# EAGLE board PCBdone_ (EAGLE 9.7.0)
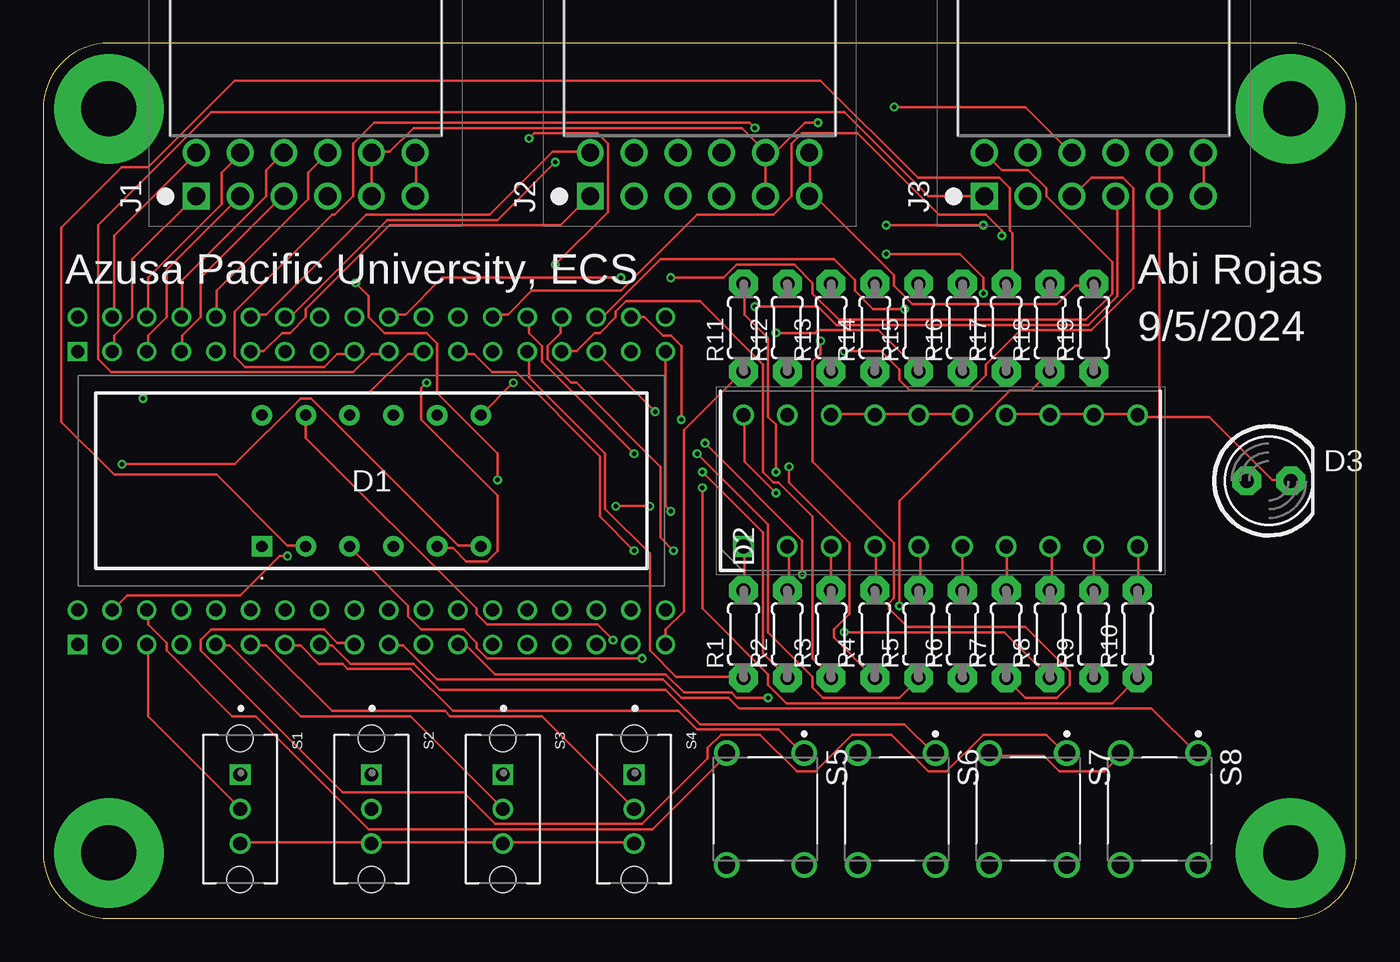
[diagram p0: board, top side]
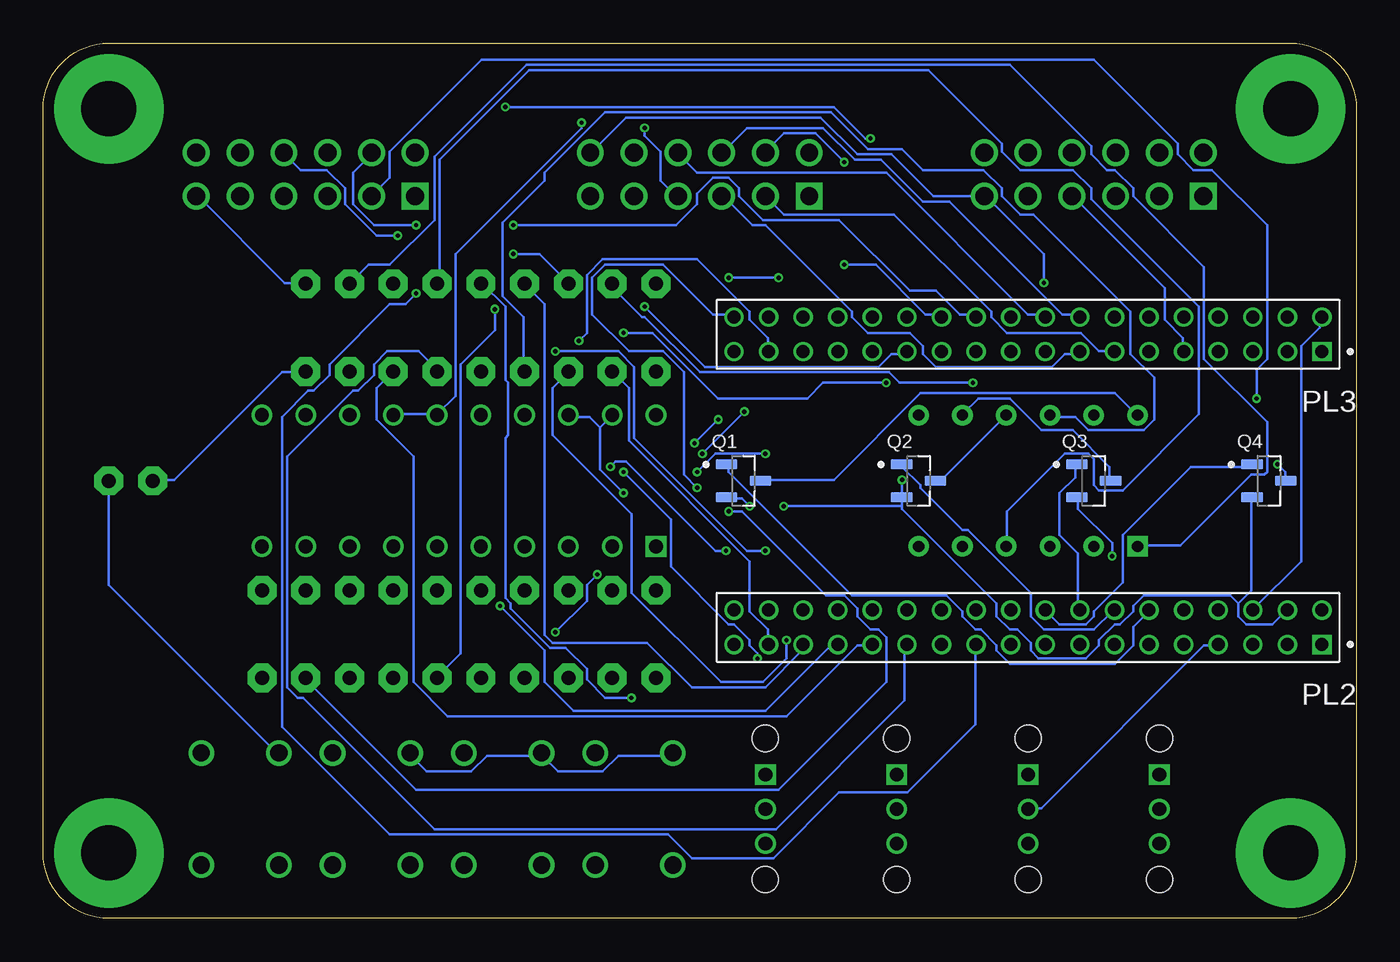
[diagram p1: board, bottom side, seen from below]

Size 76.2 x 50.8 mm. Coordinates in mm from the lower left corner, seen from the top.
Outline: 3.81,0 72.39,0 arc90 76.2,3.81 76.2,46.99 arc90 72.39,50.8 3.81,50.8 arc90 0,46.99 0,3.81 arc90 3.81,0
Copper layers (1*16): Top / Bottom
Stack-up Default Layer Stack: Top User Defined 0.035559375mm / Dielectric-1 User Defined 1.6mm / Bottom User Defined 0.035559375mm
Design rules: minimum copper width 6mil, minimum drill size 10mil, copper clearance wire_polygon to wire_polygon 6mil, copper clearance wire_polygon to pad_smd 6mil, copper clearance wire_polygon to via 6mil, copper clearance pad_smd to pad_smd 6mil, copper clearance pad_smd to via 6mil, copper clearance via to via 6mil, copper clearance smd to pad (same net) 6mil, copper clearance smd to via (same net) 6mil, copper clearance smd to smd (same net) 6mil, dimension clearance 15mil, via restrict clearance 0mil, restrict clearance 0mil, drill distance 6mil, keepout clearance 0mil

## Footprints (pad centres in the part's own frame; a part is rotated, then mirrored left to right if it is on the bottom)
LDQM282RI = drill 0.65 pad 1.192 square: 1 0,0 | drill 0.65 pad 1.192: 2 2.54,0; 3 5.08,0; 4 7.62,0; 5 10.16,0; 6 12.7,0; 7 12.7,7.62; 8 10.16,7.62; 9 7.62,7.62; 10 5.08,7.62; 11 2.54,7.62; 12 0,7.62
DIPS762W50P254L2527H825Q20N = drill 0.8 pad 1.2 square: 1 0,0 | drill 0.8 pad 1.2: 2 0,-2.54; 3 0,-5.08; 4 0,-7.62; 5 0,-10.16; 6 0,-12.7; 7 0,-15.24; 8 0,-17.78; 9 0,-20.32; 10 0,-22.86; 11 7.62,-22.86; 12 7.62,-20.32; 13 7.62,-17.78; 14 7.62,-15.24; 15 7.62,-12.7; 16 7.62,-10.16; 17 7.62,-7.62; 18 7.62,-5.08; 19 7.62,-2.54; 20 7.62,0
LED5MM = drill 0.813 pad 1.676 octagon: A -1.27,0; K 1.27,0
PMOD-SOCKET-FOR-HOST-BOARD = drill 1.04 pad 1.55 square: 1 0,0 | drill 1.04 pad 1.55: 2 2.54,0; 3 5.08,0; 4 7.62,0; 5 10.16,0; 6 12.7,0; 7 0,2.54; 8 2.54,2.54; 9 5.08,2.54; 10 7.62,2.54; 11 10.16,2.54; 12 12.7,2.54
MT_125_250 = drill 3.175 pad 6.35: 1 0,0
TE_4-1734506-1 = drill 0.75 pad 1.1 square: 1 0,0 | drill 0.75 pad 1.1: 2 0,-2; 3 2.007,0; 4 2.007,-2; 5 4.013,0; 6 4.013,-2; 7 6.02,0; 8 6.02,-2; 9 8.026,0; 10 8.026,-2; 11 10.033,0; 12 10.033,-2; 13 12.04,0; 14 12.04,-2; 15 14.046,0; 16 14.046,-2; 17 16.053,0; 18 16.053,-2; 19 18.059,0; 20 18.059,-2; 21 20.066,0; 22 20.066,-2; 23 22.073,0; 24 22.073,-2; 25 24.079,0; 26 24.079,-2; 27 26.086,0; 28 26.086,-2; 29 28.092,0; 30 28.092,-2; 31 30.099,0; 32 30.099,-2; 33 32.106,0; 34 32.106,-2; 35 34.112,0; 36 34.112,-2
SOT95P230X110-3N = smd 1.26 x 0.59: 1 -0.98,0.95; 2 -0.98,-0.95; 3 0.98,0
0204/5 = drill 0.813 pad 1.676 octagon: 1 -2.54,0; 2 2.54,0
SW_OS102011MS2QN1 = drill 0.8 square: 1 -2,0 | drill 0.8: 2 0,0; 3 2,0 | hole 1.5: -4.1,0; 4.1,0
SW_1825910-7 = drill 0.99: 1 -3.25,2.25; 2 3.25,2.25; 3 -3.25,-2.25; 4 3.25,-2.25

## Placement (x,y rotation side)
D1  [LDQM282RI]  12.7,21.59 0 top
D2  [DIPS762W50P254L2527H825Q20N]  40.64,21.59 90 top
D3  [LED5MM]  71.12,25.4 0 top
J1  [PMOD-SOCKET-FOR-HOST-BOARD]  8.89,41.91 0 top
J2  [PMOD-SOCKET-FOR-HOST-BOARD]  31.75,41.91 0 top
J3  [PMOD-SOCKET-FOR-HOST-BOARD]  54.61,41.91 0 top
MT1  [MT_125_250]  72.39,3.81 0 top
MT2  [MT_125_250]  72.39,46.99 0 top
MT3  [MT_125_250]  3.81,46.99 0 top
MT4  [MT_125_250]  3.81,3.81 0 top
PL2  [TE_4-1734506-1]  2,15.9 180 bottom
PL3  [TE_4-1734506-1]  2,32.9 180 bottom
Q1  [SOT95P230X110-3N]  35.56,25.4 0 bottom
Q2  [SOT95P230X110-3N]  25.4,25.4 0 bottom
Q3  [SOT95P230X110-3N]  15.24,25.4 0 bottom
Q4  [SOT95P230X110-3N]  5.08,25.4 0 bottom
R1  [0204/5]  40.64,16.51 90 top
R2  [0204/5]  43.18,16.51 90 top
R3  [0204/5]  45.72,16.51 90 top
R4  [0204/5]  48.26,16.51 90 top
R5  [0204/5]  50.8,16.51 90 top
R6  [0204/5]  53.34,16.51 90 top
R7  [0204/5]  55.88,16.51 90 top
R8  [0204/5]  58.42,16.51 90 top
R9  [0204/5]  60.96,16.51 90 top
R10  [0204/5]  63.5,16.51 90 top
R11  [0204/5]  40.64,34.29 90 top
R12  [0204/5]  43.18,34.29 90 top
R13  [0204/5]  45.72,34.29 90 top
R14  [0204/5]  48.26,34.29 90 top
R15  [0204/5]  50.8,34.29 90 top
R16  [0204/5]  53.34,34.29 90 top
R17  [0204/5]  55.88,34.29 90 top
R18  [0204/5]  58.42,34.29 90 top
R19  [0204/5]  60.96,34.29 90 top
S1  [SW_OS102011MS2QN1]  11.43,6.35 270 top
S2  [SW_OS102011MS2QN1]  19.05,6.35 270 top
S3  [SW_OS102011MS2QN1]  26.67,6.35 270 top
S4  [SW_OS102011MS2QN1]  34.29,6.35 270 top
S5  [SW_1825910-7]  41.91,6.35 270 top
S6  [SW_1825910-7]  49.53,6.35 270 top
S7  [SW_1825910-7]  57.15,6.35 270 top
S8  [SW_1825910-7]  64.77,6.35 270 top

## Library data of the parts
D1 = eagle-library-engr-240-f24; DESCRIPTION: LED Displays & Accessories LED Display; HEIGHT: 6.05mm; MANUFACTURER_NAME: Lumex; MANUFACTURER_PART_NUMBER: LDQ-M282RI; MOUSER_PART_NUMBER: 696-LDQ-M282RI; MOUSER_PRICE-STOCK: https://www.mouser.com/Search/Refine.aspx?Keyword=696-LDQ-M282RI
D2 = eagle-library-engr-240-f24; DESCRIPTION: LED Uni-Color Green 565nm 20-Pin PDIP; HEIGHT: 8.25mm; MANUFACTURER_NAME: Lite-On; MANUFACTURER_PART_NUMBER: LTA-1000G; MOUSER_PART_NUMBER: 859-LTA-1000G; MOUSER_PRICE-STOCK: https://www.mouser.co.uk/ProductDetail/Lite-On/LTA-1000G?qs=%2FTKcI5XXRKq0QINzVmwJHg%3D%3D
D3 J1-J3 MT1-MT4 PL2 PL3 R1-R19 = eagle-library-engr-240-f24
Q1-Q4 = eagle-library-engr-240-f24; MANUFACTURER: Nexperia; MAXIMUM_PACKAGE_HEIGHT: 1.10 mm; PARTREV: 1; SNAPEDA_PN: NX2301P; STANDARD: IPC 7351B
S1-S4 = eagle-library-engr-240-f24; MANUFACTURER: C&K; STANDARD: MANUFACTURER RECOMMENDATIONS
S5-S8 = eagle-library-engr-240-f24; MANUFACTURER: TE Connectivity; PARTREV: C10; STANDARD: Manufacturer Recommendation

## Nets
3.3V: J1.6 J1.12 J2.6 J2.12 J3.6 J3.12 PL2.4 Q1.2 Q2.2 Q3.2 Q4.2 R19.2
BAR_1: PL3.27 R1.1
BAR_2: PL3.28 R2.1
BAR_3: PL3.29 R3.1
BAR_4: PL3.30 R4.1
BAR_5: PL3.31 R5.1
BAR_6: PL3.32 R6.1
BAR_7: PL3.33 R7.1
BAR_8: PL3.34 R8.1
BAR_9: PL3.35 R9.1
BAR_10: PL3.36 R10.1
BUTTON_1: PL2.13 S5.1
BUTTON_2: PL2.15 S6.1
BUTTON_3: PL2.17 S7.1
BUTTON_4: PL2.19 S8.1
DIGIT_1: PL2.12 Q1.1
DIGIT_1_A: D1.12 Q1.3
DIGIT_2: PL2.14 Q2.1
DIGIT_2_A: D1.9 Q2.3
DIGIT_3: PL2.16 Q3.1
DIGIT_3_A: D1.8 Q3.3
DIGIT_4: PL2.18 Q4.1
DIGIT_4_A: D1.6 Q4.3
GND: D2.11 D2.12 D2.13 D2.14 D2.15 D2.16 D2.17 D2.18 D2.19 D2.20 D3.K J1.5 J1.11 J2.5 J2.11 J3.5 J3.11 PL2.6 PL3.2 S5.3 S6.3 S7.3 S8.3
N$2: D3.A R19.1
N$3: S1.3 S2.3 S3.3 S4.3
N$4: D1.1 R18.2
N$6: D1.2 R17.2
N$7: D2.1 R1.2
N$8: D1.3 R11.2
N$9: D2.2 R2.2
N$10: D1.4 R16.2
N$12: D1.5 R12.2
N$13: D2.3 R3.2
N$15: D2.4 R4.2
N$16: D1.11 R13.1
N$18: D1.10 R14.1
N$19: D2.5 R5.2
N$21: D2.6 R6.2
N$22: D1.7 R15.1
N$24: D2.7 R7.2
N$26: D2.8 R8.2
N$28: D2.9 R9.2
N$30: D2.10 R10.2
PMOD_1_1: J1.1 PL3.3
PMOD_1_2: J1.2 PL3.5
PMOD_1_3: J1.3 PL3.7
PMOD_1_4: J1.4 PL3.9
PMOD_1_5: J1.7 PL3.4
PMOD_1_6: J1.8 PL3.6
PMOD_1_7: J1.9 PL3.8
PMOD_1_8: J1.10 PL3.10
PMOD_2_1: J2.1 PL3.11
PMOD_2_2: J2.2 PL3.13
PMOD_2_3: J2.3 PL3.15
PMOD_2_4: J2.4 PL3.17
PMOD_2_5: J2.7 PL3.12
PMOD_2_6: J2.8 PL3.14
PMOD_2_7: J2.9 PL3.16
PMOD_2_8: J2.10 PL3.18
PMOD_3_1: J3.1 PL3.19
PMOD_3_2: J3.2 PL3.21
PMOD_3_3: J3.3 PL3.23
PMOD_3_4: J3.4 PL3.25
PMOD_3_5: J3.7 PL3.20
PMOD_3_6: J3.8 PL3.22
PMOD_3_7: J3.9 PL3.24
PMOD_3_8: J3.10 PL3.26
SEGMENT_A: PL2.21 R13.2
SEGMENT_B: PL2.23 R15.2
SEGMENT_C: PL2.25 R16.1
SEGMENT_D: PL2.27 R17.1
SEGMENT_DP: PL2.35 R11.1
SEGMENT_E: PL2.29 R18.1
SEGMENT_F: PL2.31 R14.2
SEGMENT_G: PL2.33 R12.1
SWITCH_1: PL2.5 S1.2
SWITCH_2: PL2.7 S2.2
SWITCH_3: PL2.9 S3.2
SWITCH_4: PL2.11 S4.2

## Tracks (layer width: path | path; a pad name or v marks a point on that pad's centre or on a via)
3.3V  (via drill 0.25)
  Top 0.152: v14.17,21.03 13.72,21.03 11.43,18.75 4.88,18.75 4.12,17.98 PL2.4 | v33.22,23.93 v35.2,23.93 | J3.6 67.36,41.91 67.36,44.35 J3.12 | J1.6 21.64,41.91 21.64,44.35 J1.12 | 44.5,42.22 44.5,44.35 J2.12 | 44.5,42.22 44.5,41.91 J2.6 44.5,42.22 | 44.5,42.22 49.38,37.34 49.38,36.73 50.44,35.66 58.83,35.66 59.89,36.73 60.96,36.73 R19.2 | v26.36,25.45 26.36,26.98 22.86,30.48 22.86,33.38 22.25,33.98 19.81,33.98 18.9,34.9 18.9,36.12 v18.14,36.88
  Bottom 0.152: 6.86,18.29 6.1,19.05 6.1,24.38 Q4.2 | 6.86,18.29 6.86,17.53 6.4,17.07 4.88,17.07 4.12,17.83 PL2.4 | v14.17,21.03 14.17,21.79 16.15,23.77 16.15,24.38 Q3.2 | 26.36,23.93 26.36,23.77 20.88,18.29 20.88,17.53 20.12,16.76 19.66,16.76 18.9,16 18.9,15.54 18.44,15.09 15.7,15.09 14.94,15.85 14.94,16.15 14.02,17.07 13.72,17.07 12.95,17.83 12.95,18.14 12.34,18.75 7.32,18.75 6.86,18.29 | 26.36,23.93 26.36,24.38 Q2.2 26.36,24.54 v26.36,25.45 | v35.2,23.93 35.66,24.38 36.42,24.38 Q1.2 | 26.36,23.93 v33.22,23.93 | R19.2 60.96,36.88 62.18,36.88 67.21,41.91 J3.6 | J2.12 44.35,44.5 42.37,46.48 31.09,46.48 28.96,44.35 26.98,44.35 24.54,41.91 J1.6 21.49,41.91 18.14,38.56 v18.14,36.88
BAR_1
  Top 0.152: PL3.27 28.19,32.77 28.19,31.39 32.61,26.98 32.61,23.77 35.2,21.18 35.2,15.54 36.73,14.02 40.54,14.02 R1.1
BAR_2  (via drill 0.25)
  Top 0.152: v34.29,26.98 28.96,32.31 28.96,33.22 28.19,33.98 28.19,34.9 PL3.28 | v38.25,25.91 41.76,22.4 41.76,15.39 R2.1
  Bottom 0.152: v34.29,26.98 37.19,26.98 v38.25,25.91
BAR_3
  Top 0.152: PL3.29 30.18,32.92 30.94,32.92 32,33.98 32.31,33.98 33.22,34.9 33.22,35.2 33.83,35.81 38.1,35.81 41.76,32.16 41.76,25.91 42.37,25.3 42.67,25.3 44.65,23.32 44.65,15.09 45.72,14.02 R3.1
BAR_4  (via drill 0.25)
  Top 0.152: v36.58,21.34 35.81,22.1 35.81,26.21 30.94,31.09 30.63,31.09 29.26,32.46 29.26,33.22 30.02,33.98 30.02,34.9 PL3.30 | v43.28,26.21 43.28,25.3 46.79,21.79 46.79,17.68 45.87,16.76 45.87,16.31 48.16,14.02 R4.1
  Bottom 0.152: v36.58,21.34 37.19,21.34 42.37,26.52 42.98,26.52 v43.28,26.21
BAR_5  (via drill 0.25)
  Top 0.152: v35.51,29.41 32.16,32.77 PL3.31 | v37.95,26.98 42.06,22.86 42.06,16.61 44.65,14.02 44.65,13.41 45.26,12.8 49.68,12.8 50.75,13.87 R5.1
  Bottom 0.152: v37.95,26.98 v35.51,29.41
BAR_6  (via drill 0.25)
  Top 0.152: v49.99,35.36 48.16,35.36 47.09,36.42 47.09,37.03 45.87,38.25 35.81,38.25 32.61,35.05 32.16,35.05 PL3.32
  Bottom 0.152: v49.99,35.36 49.99,34.14 51.97,32.16 51.97,15.39 53.34,14.02 R6.1
BAR_7  (via drill 0.25)
  Top 0.152: v45.11,33.53 45.11,32.77 44.65,32.31 44.65,26.52 49.38,21.79 49.38,18.59 49.07,18.29 49.07,17.98 50.14,16.92 57,16.92 59.59,14.33 59.59,13.56 58.83,12.8 57,12.8 55.93,13.87 R7.1
  Bottom 0.152: v45.11,33.53 44.65,33.98 44.65,37.34 43.74,38.25 38.25,38.25 35.2,35.2 35.2,34.75 34.14,33.68 34.14,32.92 PL3.33
BAR_8  (via drill 0.25)
  Top 0.152: v37.03,28.96 37.03,33.22 36.42,33.83 35.97,33.83 34.9,34.9 34.14,34.9 PL3.34 | v38.41,27.58 44.04,21.95 v44.04,19.96 | v46.48,16.61 55.78,16.61 R8.1
  Bottom 0.152: v38.41,27.58 v37.03,28.96 | v44.04,19.96 44.65,19.36 44.65,18.44 v46.48,16.61
BAR_9  (via drill 0.25)
  Top 0.152: v36.42,23.62 36.12,23.93 36.12,32.77 PL3.35
  Bottom 0.152: v36.42,23.62 35.66,23.62 30.79,18.75 29.72,18.75 28.96,17.98 28.96,17.53 28.19,16.76 27.74,16.76 27.28,16.31 27.28,13.72 33.53,7.47 54.56,7.47 60.96,13.87 R9.1
BAR_10  (via drill 0.25)
  Top 0.152: v38.25,24.99 38.25,17.98 42.06,14.17 42.06,13.56 43.13,12.5 62.03,12.5 R10.1
  Bottom 0.152: v38.25,24.99 39.01,25.76 39.01,31.7 40.23,32.92 42.22,32.92 44.35,35.05 44.35,37.19 43.59,37.95 40.23,37.95 37.34,35.05 36.12,35.05 PL3.36
BUTTON_1
  Top 0.152: PL2.13 14.17,15.85 14.94,15.85 16,14.78 17.37,14.78 17.68,14.48 21.34,14.48 23.77,12.04 36.88,12.04 37.95,10.97 42.67,10.97 44.04,9.6 S5.1
BUTTON_2
  Top 0.152: PL2.15 16.15,15.85 16.76,15.85 17.83,14.78 21.49,14.78 23.01,13.26 36.12,13.26 38.1,11.28 49.99,11.28 51.66,9.6 S6.1
BUTTON_3
  Top 0.152: PL2.17 17.98,16 17.07,16 16.31,16.76 9.75,16.76 9.14,16.15 9.14,15.54 17.37,7.32 24.38,7.32 26.21,5.49 34.75,5.49 38.56,9.3 38.56,9.91 39.32,10.67 41.6,10.67 43.74,8.53 44.81,8.53 46.94,10.67 49.23,10.67 51.36,8.53 52.43,8.53 54.56,10.67 58.22,10.67 59.28,9.6 S7.1
BUTTON_4
  Top 0.152: PL2.19 20.12,15.85 20.88,15.85 22.86,13.87 35.97,13.87 37.03,12.8 39.78,12.8 40.39,12.19 64.31,12.19 66.9,9.6 S8.1
DIGIT_1
  Bottom 0.152: Q1.1 36.42,26.21 36.42,25.91 29.26,18.75 23.77,18.75 22.86,17.83 22.86,17.53 22.1,16.76 21.79,16.76 20.88,15.85 20.88,15.54 20.12,14.78 14.02,14.78 12.95,15.85 12.95,16.92 12.04,17.83 PL2.12
DIGIT_1_A
  Bottom 0.152: Q1.3 34.44,25.45 30.33,25.45 25.3,30.48 14.02,30.48 12.8,29.26 D1.12
DIGIT_2
  Bottom 0.152: Q2.1 26.36,26.21 25.3,25.15 25.3,24.99 22.86,22.55 22.55,22.55 18.9,18.9 18.9,17.53 18.14,16.76 15.24,16.76 14.17,17.83 PL2.14
DIGIT_2_A
  Bottom 0.152: D1.9 24.08,25.45 24.38,25.45 Q2.3
DIGIT_3
  Bottom 0.152: Q3.1 16.31,26.21 16.31,25.6 17.22,24.69 17.22,22.25 16.15,21.18 16.15,17.98 PL2.16
DIGIT_3_A
  Bottom 0.152: Q3.3 14.33,25.45 14.33,26.21 16.46,28.35 18.29,28.35 20.12,30.18 21.95,30.18 22.86,29.26 D1.8
DIGIT_4
  Bottom 0.152: Q4.1 6.1,26.21 9.6,26.21 13.56,22.25 13.56,19.51 15.24,17.83 15.24,17.53 15.7,17.07 17.22,17.07 17.98,17.83 PL2.18
DIGIT_4_A  (via drill 0.25)
  Top 0.152: v4.57,26.36 11.12,26.36 14.94,30.18 15.54,30.18 24.08,21.64 25.3,21.64 D1.6
  Bottom 0.152: v4.57,26.36 4.12,25.91 4.12,25.45 Q4.3
GND  (via drill 0.25)
  Top 0.152: J1.5 J1.11 19.05,44.5 20.12,44.5 21.49,45.87 40.54,45.87 41.91,44.5 | J2.5 J2.11 41.91,44.5 | v42.52,24.69 40.69,26.52 40.69,29.11 D2.20 | D2.15 53.34,29.26 50.9,29.26 D2.16 50.75,29.26 48.31,29.26 D2.17 48.16,29.26 45.72,29.26 D2.18 | J3.11 J3.5 64.77,29.11 | D2.14 55.93,29.26 58.37,29.26 D2.13 58.52,29.26 60.96,29.26 | 60.96,29.26 63.4,29.26 D2.11 63.55,29.11 64.77,29.11 | 60.96,29.26 D2.12 | 64.77,29.11 67.67,29.11 71.32,25.45 72.39,25.45 D3.K | 41.91,44.5 42.52,44.5 44.2,46.18 v44.96,46.18 | S7.3 55.02,9.45 58.06,9.45 58.98,8.53 61.57,8.53 62.48,9.45 S8.3 | PL2.6 6.1,17.83 6.1,17.07 7.16,16 7.16,15.54 10.97,11.73 12.34,11.73 18.9,5.18 35.36,5.18 39.62,9.45 S5.3
  Bottom 0.152: v42.52,24.69 43.89,26.06 43.89,28.5 | D2.19 43.89,28.5 | 43.89,28.5 44.5,29.11 45.72,29.11 D2.18 | 53.34,29.26 55.78,29.26 D2.14 | v44.96,46.18 44.96,45.87 52.27,38.56 52.27,30.33 53.34,29.26 | 53.34,29.26 D2.15 | PL3.2 2.13,34.9 2.13,34.29 3.2,33.22 3.2,20.73 5.94,17.98 PL2.6 | S5.3 39.78,9.45 42.82,9.45 43.74,8.53 46.33,8.53 47.24,9.45 S6.3 47.4,9.45 50.44,9.45 51.36,8.53 53.95,8.53 54.86,9.45 S7.3 | D3.K 72.39,19.36 62.64,9.6 S8.3
N$2
  Bottom 0.152: D3.A 69.8,25.45 68.58,25.45 62.33,31.7 60.96,31.7 R19.1
N$3
  Top 0.152: 19.05,4.42 11.43,4.42 S1.3 | 19.05,4.42 26.67,4.42 | 19.05,4.42 S2.3 | 26.67,4.42 34.29,4.42 S4.3 | 26.67,4.42 S3.3
N$4
  Bottom 0.152: R18.2 57.3,37.95 56.08,37.95 53.49,40.54 53.49,44.2 48.16,49.53 20.12,49.53 15.39,44.81 15.39,44.35 14.48,43.43 14.02,43.43 12.95,42.37 12.95,41.91 8.84,37.8 8.84,32.46 5.18,28.8 5.18,25.91 5.33,25.76 6.1,25.76 10.21,21.64 12.65,21.64 D1.1
N$6
  Top 0.152: R17.2 56.24,37.19 56.24,39.78 56.08,39.93 56.08,42.37 55.47,42.98 50.75,42.98 45.11,48.62 11.12,48.62 6.1,43.59 4.57,43.59 1.07,40.08 1.07,28.8 4.12,25.76 10.06,25.76 14.17,21.64 15.24,21.64 D1.2
N$7
  Top 0.152: D2.1 40.69,21.49 40.69,19.05 R1.2
N$8  (via drill 0.25)
  Top 0.152: v34.75,15.09 25.76,15.09 25.15,15.7 25.15,16 24.38,16.76 21.95,16.76 21.18,17.53 21.18,18.14 17.83,21.49 D1.3 | v42.52,25.91 42.52,28.65 42.06,29.11 42.06,33.68 40.69,35.05 40.69,36.73 R11.2
  Bottom 0.152: v34.75,15.09 34.75,15.39 35.2,15.85 35.2,16.15 36.12,17.07 36.42,17.07 39.78,20.42 39.78,23.16 v42.52,25.91
N$9
  Top 0.152: D2.2 43.28,21.49 43.28,19.05 R2.2
N$10
  Bottom 0.152: D1.4 20.27,21.64 20.27,23.62 16.92,26.98 15.54,26.98 15.24,26.67 15.24,25.15 14.94,24.84 13.56,24.84 9.14,29.26 9.14,35.51 15.39,41.76 15.39,42.37 16.46,43.43 19.51,43.43 20.57,44.5 20.57,44.96 24.84,49.23 48.01,49.23 53.19,44.04 53.19,37.03 53.34,36.88 R16.2
N$12  (via drill 0.25)
  Top 0.152: v22.25,31.09 21.95,30.79 21.95,28.96 26.36,24.54 26.36,21.34 25.76,20.73 24.54,20.73 23.77,21.49 22.86,21.49 D1.5
  Bottom 0.152: v22.25,31.09 26.52,31.09 27.13,31.7 38.1,31.7 41.3,34.9 41.45,34.9 43.28,36.73 R12.2
N$13
  Top 0.152: R3.2 D2.3
N$15
  Top 0.152: D2.4 48.31,21.49 48.31,19.05 R4.2
N$16  (via drill 0.25)
  Top 0.152: D1.11 15.24,27.89 25.15,17.98 25.15,17.68 25.76,17.07 32.16,17.07 v33.07,16.15
  Bottom 0.152: v33.07,16.15 33.07,15.09 34.44,13.72 36.88,13.72 42.06,18.9 42.06,23.47 46.63,28.04 46.63,30.79 45.72,31.7 R13.1
N$18
  Bottom 0.152: D1.10 17.68,29.11 16.31,29.11 15.54,28.35 12.34,28.35 11.73,28.96 11.73,31.39 13.11,32.77 13.11,35.2 18.75,40.84 19.51,40.84 20.57,41.91 20.57,42.37 21.64,43.43 25.15,43.43 26.36,44.65 28.35,44.65 30.48,46.79 43.59,46.79 47.09,43.28 47.09,42.82 49.53,40.39 49.53,36.12 48.31,34.9 48.31,31.85 R14.1
N$19
  Top 0.152: D2.5 50.9,21.49 50.9,19.05 R5.2
N$21
  Top 0.152: R6.2 D2.6
N$22  (via drill 0.25)
  Top 0.152: v27.28,31.09 D1.7 | v42.52,33.98 44.81,33.98 44.96,34.14 48.46,34.14 50.75,31.85 R15.1
  Bottom 0.152: v27.28,31.09 30.94,31.09 31.85,30.18 37.03,30.18 40.84,33.98 v42.52,33.98
N$24
  Top 0.152: D2.7 55.93,21.49 55.93,19.05 R7.2
N$26
  Top 0.152: D2.8 58.52,21.49 58.52,19.05 R8.2
N$28
  Top 0.152: R9.2 D2.9
N$30
  Top 0.152: D2.10 63.55,21.49 63.55,19.05 R10.2
PMOD_1_1
  Top 0.152: PL3.3 4.12,32.92 4.12,33.83 5.18,34.9 5.18,38.25 8.84,41.91 J1.1
PMOD_1_2
  Top 0.152: J1.2 7.16,37.64 7.16,34.9 6.1,33.83 6.1,32.92 PL3.5
PMOD_1_3
  Top 0.152: PL3.7 8.08,32.92 8.08,33.83 9.14,34.9 9.14,37.19 13.87,41.91 J1.3
PMOD_1_4
  Bottom 0.152: PL3.9 10.06,32.92 10.06,33.68 11.12,34.75 11.12,36.58 16.46,41.91 J1.4
PMOD_1_5
  Top 0.152: PL3.4 4.12,35.05 4.12,39.62 8.84,44.35 J1.7
PMOD_1_6
  Top 0.152: PL3.6 6.1,35.05 6.1,37.19 10.36,41.45 10.36,43.28 11.43,44.35 J1.8
PMOD_1_7
  Top 0.152: J1.9 12.95,43.43 12.95,41.91 8.08,37.03 8.08,35.05 PL3.8
PMOD_1_8
  Top 0.152: PL3.10 10.06,35.05 10.06,36.42 15.39,41.76 15.39,43.28 16.46,44.35 J1.10
PMOD_2_1
  Top 0.152: PL3.11 12.04,32.92 12.8,32.92 13.87,33.98 14.33,33.98 15.24,34.9 15.24,35.36 20.12,40.23 30.02,40.23 31.7,41.91 J2.1
PMOD_2_2
  Bottom 0.152: J2.2 33.22,40.84 26.82,40.84 21.18,35.2 21.18,34.9 20.27,33.98 16,33.98 14.94,32.92 14.17,32.92 PL3.13
PMOD_2_3
  Bottom 0.152: PL3.15 16.15,32.77 16.92,32.77 17.68,32 24.38,32 25.15,32.77 25.15,33.22 25.91,33.98 28.35,33.98 29.26,34.9 29.26,35.2 34.29,40.23 35.05,40.23 36.73,41.91 J2.3
PMOD_2_4  (via drill 0.25)
  Top 0.152: v41.3,45.87 41,46.18 19.2,46.18 17.98,44.96 17.98,41.91 16.92,40.84 16.76,40.84 11.12,35.2 11.12,32.61 11.73,32 16.31,32 17.07,32.77 17.98,32.77 PL3.17
  Bottom 0.152: v41.3,45.87 41.3,45.41 40.39,44.5 40.39,42.82 39.47,41.91 J2.4
PMOD_2_5
  Top 0.152: PL3.12 12.04,35.05 12.95,35.05 18.75,40.84 25.91,40.84 29.57,44.5 31.7,44.5 J2.7
PMOD_2_6  (via drill 0.25)
  Top 0.152: v29.72,43.89 26.36,40.54 19.96,40.54 14.48,35.05 14.17,35.05 PL3.14
  Bottom 0.152: v29.72,43.89 31.39,45.57 33.22,45.57 34.29,44.5 J2.8
PMOD_2_7
  Bottom 0.152: PL3.16 16.15,35.05 17.07,35.05 23.62,41.6 25.15,41.6 27.58,44.04 29.11,44.04 30.94,45.87 35.36,45.87 36.73,44.5 J2.9
PMOD_2_8
  Bottom 0.152: PL3.18 18.14,35.05 19.05,35.05 27.28,43.28 38.25,43.28 39.32,44.35 J2.10
PMOD_3_1
  Top 0.152: J3.1 51.36,41.91 46.48,46.79 9.75,46.79 3.2,40.23 3.2,32.46 3.96,31.7 17.98,31.7 19.05,32.77 19.96,32.77 PL3.19
PMOD_3_2  (via drill 0.25)
  Top 0.152: v5.79,30.18 6.1,30.48 18.9,30.48 21.18,32.77 21.95,32.77 PL3.21
  Bottom 0.152: v5.79,30.18 5.79,31.85 5.18,32.46 5.18,40.23 8.38,43.43 9.45,43.43 10.36,44.35 10.36,44.96 15.24,49.84 50.75,49.84 56.08,44.5 56.08,42.98 J3.2
PMOD_3_3  (via drill 0.25)
  Top 0.152: v34.29,21.34 32.31,23.32 32.31,26.82 27.43,31.7 26.06,31.7 24.99,32.77 24.08,32.77 PL3.23 | v46.48,32.92 48.62,32.92 49.68,31.85 49.68,31.24 50.29,30.63 53.8,30.63 54.71,31.55 54.71,32.16 56.69,34.14 60.81,34.14 63.25,36.58 63.25,42.37 62.64,42.98 60.81,42.98 59.74,41.91 J3.3
  Bottom 0.152: v34.29,21.34 35.36,21.34 41.91,27.89 41.91,32 42.82,32.92 v46.48,32.92
PMOD_3_4  (via drill 0.25)
  Top 0.152: v41.3,35.51 44.96,35.51 46.02,34.44 60.66,34.44 62.33,36.12 62.33,41.91 J3.4
  Bottom 0.152: v41.3,35.51 37.8,32 27.74,32 26.98,32.77 26.21,32.77 PL3.25
PMOD_3_5  (via drill 0.25)
  Top 0.152: v33.53,37.19 23.16,37.19 21.03,35.05 20.12,35.05 PL3.20 | v36.42,37.19 39.47,37.19 40.23,37.95 43.59,37.95 44.65,36.88 44.65,36.27 46.18,34.75 60.5,34.75 62.03,36.27 62.03,38.1 58.22,41.91 58.22,42.37 57.15,43.43 55.63,43.43 J3.7
  Bottom 0.152: v36.42,37.19 v33.53,37.19
PMOD_3_6  (via drill 0.25)
  Top 0.152: v54.56,40.23 v48.92,40.23
  Bottom 0.152: v48.92,40.23 39.47,40.23 38.25,41.45 38.25,42.06 37.34,42.98 36.42,42.98 35.81,42.37 35.81,41.91 34.44,40.54 30.02,40.54 25.91,36.42 24.38,36.42 23.01,35.05 22.1,35.05 PL3.22 | v54.56,40.23 57,40.23 58.22,41.45 58.22,43.28 57.15,44.35 J3.8
PMOD_3_7  (via drill 0.25)
  Top 0.152: v29.72,37.95 32.77,41 32.77,44.96 32.16,45.57 28.5,45.57 v28.19,45.26 | v49.38,47.09 57,47.09 59.59,44.5 J3.9
  Bottom 0.152: v29.72,37.95 27.89,37.95 24.99,35.05 24.08,35.05 PL3.24 | v28.19,45.26 28.5,45.26 30.33,47.09 v49.38,47.09
PMOD_3_8  (via drill 0.25)
  Top 0.152: v55.63,39.62 55.63,39.93 54.71,40.84 51.97,40.84 47.24,45.57 44.04,45.57 43.43,44.96 43.43,41.91 42.37,40.84 37.95,40.84 33.53,36.42 28.35,36.42 26.98,35.05 26.21,35.05 PL3.26
  Bottom 0.152: v55.63,39.62 56.84,39.62 58.67,41.45 58.67,42.37 59.74,43.43 61.27,43.43 62.18,44.35 J3.10
SEGMENT_A  (via drill 0.25)
  Top 0.152: v54.56,36.27 54.56,37.19 53.19,38.56 v48.92,38.56
  Bottom 0.152: v54.56,36.27 55.17,35.66 56.08,35.66 59.59,32.16 59.59,31.55 60.5,30.63 60.81,30.63 62.33,29.11 62.33,11.12 56.08,4.88 39.93,4.88 38.56,3.5 33.83,3.5 30.02,7.32 26.06,7.32 22.1,11.28 22.1,15.85 PL2.21 | v48.92,38.56 47.4,38.56 45.72,36.88 R13.2
SEGMENT_B  (via drill 0.25)
  Top 0.152: v42.06,12.8 40.23,12.8 39.93,13.11 37.19,13.11 36.12,14.17 26.21,14.17 24.54,15.85 24.08,15.85 PL2.23
  Bottom 0.152: v42.06,12.8 43.59,12.8 44.65,13.87 44.65,14.48 45.87,15.7 46.79,15.7 49.07,17.98 49.07,18.29 49.38,18.59 49.38,27.89 49.23,28.04 49.23,31.09 49.38,31.24 49.38,35.51 50.75,36.88 R15.2
SEGMENT_C
  Bottom 0.152: PL2.25 26.21,15.85 26.21,12.65 33.68,5.18 53.49,5.18 61.11,12.8 61.42,12.8 62.03,13.41 62.03,26.82 58.22,30.63 57.91,30.63 57,31.55 57,32.16 56.24,32.92 54.41,32.92 53.34,31.85 R16.1
SEGMENT_D
  Bottom 0.152: R17.1 56.84,30.79 56.84,28.96 54.71,26.82 54.71,13.72 52.73,11.73 33.07,11.73 28.96,15.85 28.19,15.85 PL2.27
SEGMENT_DP
  Top 0.152: PL2.35 36.12,16 36.12,16.76 37.19,17.83 37.19,28.35 40.54,31.7 R11.1
SEGMENT_E  (via drill 0.25)
  Top 0.152: v49.68,18.14 49.68,24.23 56.08,30.63 57.3,30.63 R18.1
  Bottom 0.152: v49.68,18.14 47.09,15.54 47.09,13.72 45.41,12.04 34.29,12.04 30.48,15.85 30.18,15.85 PL2.29
SEGMENT_F
  Bottom 0.152: R14.2 47.09,35.66 47.09,16.46 46.63,16 41.15,16 38.56,13.41 34.29,13.41 32.16,15.54 32.16,15.85 PL2.31
SEGMENT_G
  Bottom 0.152: R12.1 42.22,30.79 42.22,27.74 35.2,20.73 35.2,17.83 34.14,16.76 34.14,16 PL2.33
SWITCH_1
  Top 0.152: PL2.5 6.1,15.85 6.1,11.73 11.43,6.4 S1.2
SWITCH_2
  Bottom 0.152: PL2.7 8.08,15.85 8.84,15.85 18.29,6.4 19.05,6.4 S2.2
SWITCH_3
  Top 0.152: PL2.9 10.06,15.85 10.82,15.85 14.94,11.73 21.34,11.73 26.67,6.4 S3.2
SWITCH_4
  Top 0.152: PL2.11 12.04,15.85 12.95,15.85 16.76,12.04 23.32,12.04 23.62,11.73 28.96,11.73 34.29,6.4 S4.2

## Text on the board
SilkscreenTop: Azusa Pacific University, ECS | Abi Rojas | 9/5/2024